# Altium PCB project_vodorezov_switch.PcbDoc (part 1 of 2)
Units mm, origin at the board's own origin, x right, y up, seen from the top; angles counter-clockwise.
Board outline 100 x 50 mm, 6 copper layers (Top Layer, Signal Layer 1, Signal Layer 2, Signal Layer 3, Signal Layer 4, Bottom Layer), stack 1.503 mm thick; 130 components, 96 nets, 660 pads, 0 vias.
Unrouted connection lines stored in the file: 415.
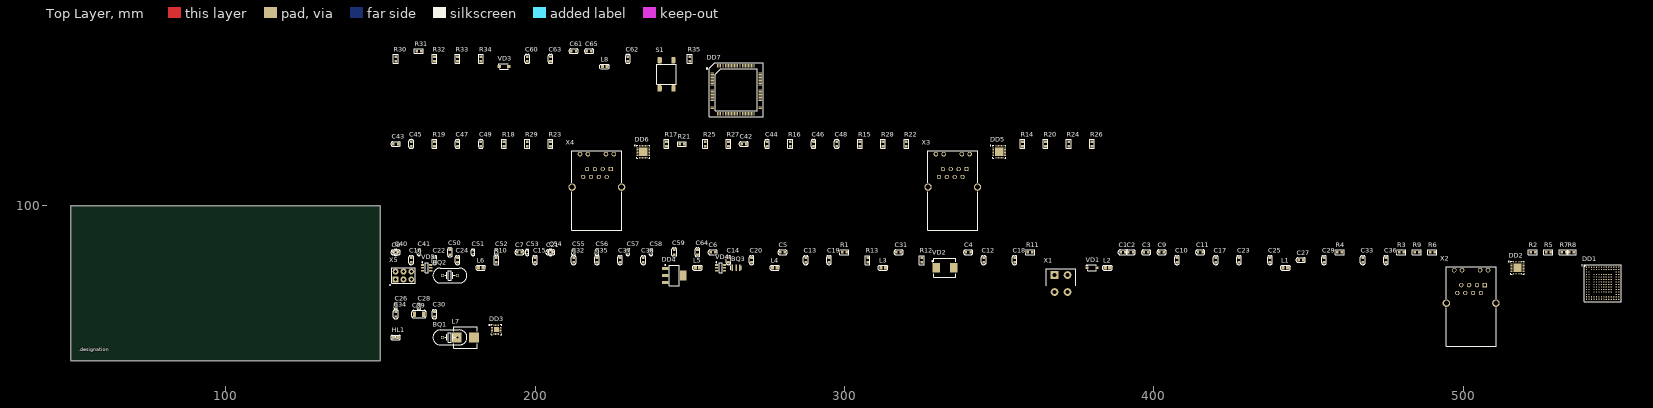
[diagram p0: Top Layer view]
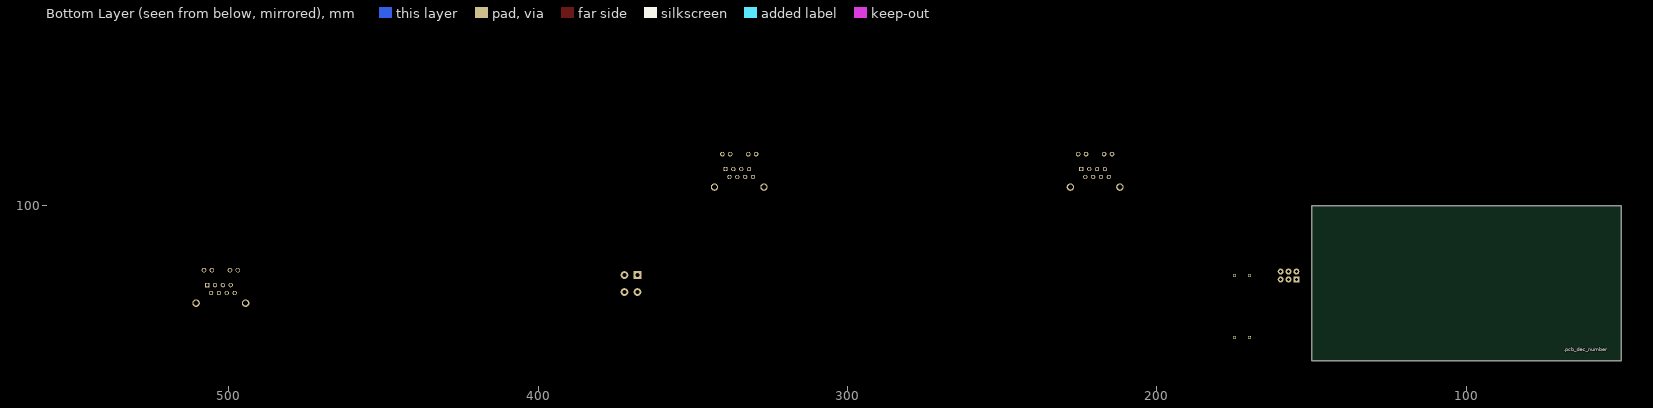
[diagram p1: Bottom Layer view, seen from below]

## Layer stack, top to bottom
Top Solder: solder mask 0.0102, Solder Resist, Dk 3.5
Top Layer: signal copper 0.018
Prepreg 1: prepreg 0.125, FR4 HiTg170, Dk 5.07
Signal Layer 1: signal copper 0.018
Core 1: core 0.51, FR4, Dk 4.6
Signal Layer 2: signal copper 0.018
Prepreg 2: prepreg 0.125, FR4 HiTg170, Dk 5.07
Signal Layer 3: signal copper 0.018
Core 2: core 0.51, FR4, Dk 4.6
Signal Layer 4: signal copper 0.018
Prepreg 3: prepreg 0.125, FR4 HiTg170, Dk 5.07
Bottom Layer: signal copper 0.018
Bottom Solder: solder mask 0.0102, Solder Resist, Dk 3.5

## Board outline
50,50 150,50 150,100 50,100

## Design rules (kind name [scope] priority, off if disabled: settings)
AcuteAngle min_acute_angle [OnCopper] p1: minimum=3.50000000000000E+0001 checktracksonly=FALSE // Минимальный угол между примитивами топологии
BoardOutlineClearance board_outline_clearance_std [NOT (OnLayer('Bottom Overlay') OR OnLayer('Top Overlay'))] p1: gap=0.25 ignorepadtopadclearanceinfootprint=FALSE except(0: Arc-SplitContinuation Track-SplitContinuation SMDPad-SplitContinuation THPad-SplitContinuation Via-SplitContinuation Fill-SplitContinuation Poly-SplitContinuation Region-SplitContinuation Text-SplitContinuation) // Отступ элементов топологии от края фрезеруемой печатной платы
Clearance clearance_outer_18um_std [OnTopLayer OR OnBottomLayer] p1: gap=0.125 ignorepadtopadclearanceinfootprint=TRUE except(0.2: Arc-Fill Arc-Poly Track-Fill Track-Poly SMDPad-SMDPad SMDPad-Fill SMDPad-Poly THPad-Fill THPad-Poly Via-Fill Via-Poly Fill-Fill Fill-Poly Poly-Poly Poly-Region Poly-Text; 0.25: Arc-Hole Track-Hole SMDPad-Hole THPad-Hole Via-Hole Fill-Hole Poly-Hole Region-Hole Text-Hole) // Зазоры на внешних слоях
Clearance clearance_inner_18um_std [NOT (OnTopLayer Or OnBottomLayer)] p2: gap=0.125 ignorepadtopadclearanceinfootprint=FALSE except(0.2: Arc-Fill Arc-Poly Track-Fill Track-Poly SMDPad-SMDPad SMDPad-Fill SMDPad-Poly THPad-Fill THPad-Poly Via-Fill Via-Poly Fill-Fill Fill-Poly Poly-Poly Poly-Region Poly-Text; 0.25: Arc-Hole Track-Hole SMDPad-Hole THPad-Hole Via-Hole Fill-Hole Poly-Hole Region-Hole Text-Hole) // Зазоры на внутренних слоях
ComponentClearance [All] p1: gap=0 collisioncheckmode=3 verticalgap=0 showdistances=FALSE
DiffPairsRouting diff_pairs_routing [All] p1: maxlimit=0.254 minlimit=0.127 mostfreqgap=0.254 toplayer_maxgap=0.127 toplayer_prefgap=0.127 toplayer_minwidth=0.143 toplayer_maxwidth=0.143 toplayer_prefwidth=0.143 midlayer1_minwidth=0.381 midlayer1_maxwidth=0.381 midlayer1_prefwidth=0.381 midlayer2_minwidth=0.381 midlayer2_maxwidth=0.381 midlayer2_prefwidth=0.381 midlayer3_minwidth=0.381 midlayer3_maxwidth=0.381 midlayer3_prefwidth=0.381 midlayer4_minwidth=0.381 midlayer4_maxwidth=0.381 midlayer4_prefwidth=0.381 bottomlayer_maxgap=0.127 bottomlayer_prefgap=0.127 bottomlayer_minwidth=0.143 bottomlayer_maxwidth=0.143 bottomlayer_prefwidth=0.143 impedanceprofiledriven=TRUE impedanceprofileid={FD46899E-B5A2-4EF5-A302-5D2DB6A51F35} maxuncoupledlength=12.7 // Правила трассировки дифференциальных пар
HoleSize min_hole_size_std [IsPad] p1: absolutevalues=TRUE maxlimit=5.9 minlimit=0.6 maxpercent=80.000 minpercent=20.000 // Диаметр межслойного переходного отверстия
HoleSize min_hole_size_via_std [IsVia] p2: absolutevalues=TRUE maxlimit=5.9 minlimit=0.3 maxpercent=80.000 minpercent=20.000 // Минимальный диаметр монтажного отверстия
HoleToHoleClearance hole_to_hole_clearance_std [All] p1: gap=0.2 allowstackedmicrovias=FALSE // Минимальное расстояние между краями двух отверстий
MinimumAnnularRing min_via_ar_std [All] p1: minimumring=0.15 // Поясок площадки переходного отверстия (Annular ring VIA)
MinimumAnnularRing min_pad_ar_std [All] p2: minimumring=0.2 // Поясок монтажной контактной площадки (Annular ring PAD)
MinimumSolderMaskSliver min_solder_mask_bridge_std [All] p1: minsoldermaskwidth=0.15 // Мнимальная ширина масочного мостика
PlaneClearance plane_clearance_18um_std [All] p1: clearance=0.2 // Отступ полигона (для слоя plane) от элементов топологии
PlaneConnect [All] p1: planeconnectstyle=Relief reliefexpansion=0.5 reliefentries=4 reliefconductorwidth=0.2 reliefairgap=0.2
PolygonConnect poly_connect_to_pad<=0.3 [(AsMM(PadXSize_AllLayers)<=0.301) or (AsMM(PadYSize_AllLayers)<=0.301)] p1: thpad.connectstyle=Relief thpad.reliefconductorwidth=0.2 thpad.reliefentries=4 thpad.polygonreliefangle="90 Angle" thpad.airgapwidth=0.2 smdpad.connectstyle=Relief smdpad.reliefconductorwidth=0.2 smdpad.reliefentries=4 smdpad.polygonreliefangle="90 Angle" smdpad.airgapwidth=0.2 via.connectstyle=Direct via.reliefconductorwidth=0.254 via.reliefentries=4 via.polygonreliefangle="90 Angle" via.airgapwidth=0.254 // Правила подключения полигонов для падов от 0,3мм и меньше
PolygonConnect poly_connect_to_pad<=0.4 [(AsMM(PadXSize_AllLayers)<=0.401) or (AsMM(PadYSize_AllLayers)<=0.401)] p2: thpad.connectstyle=Relief thpad.reliefconductorwidth=0.26 thpad.reliefentries=4 thpad.polygonreliefangle="90 Angle" thpad.airgapwidth=0.2 smdpad.connectstyle=Relief smdpad.reliefconductorwidth=0.26 smdpad.reliefentries=4 smdpad.polygonreliefangle="90 Angle" smdpad.airgapwidth=0.2 via.connectstyle=Direct via.reliefconductorwidth=0.254 via.reliefentries=4 via.polygonreliefangle="90 Angle" via.airgapwidth=0.254 // Правила подключения полигонов для падов от 0,4 и меньше
PolygonConnect poly_connect_to_pad<=0.6 [(AsMM(PadXSize_AllLayers)<=0.601) or (AsMM(PadYSize_AllLayers)<=0.601)] p3: thpad.connectstyle=Relief thpad.reliefconductorwidth=0.33 thpad.reliefentries=4 thpad.polygonreliefangle="90 Angle" thpad.airgapwidth=0.2 smdpad.connectstyle=Relief smdpad.reliefconductorwidth=0.33 smdpad.reliefentries=4 smdpad.polygonreliefangle="90 Angle" smdpad.airgapwidth=0.2 via.connectstyle=Direct via.reliefconductorwidth=0.254 via.reliefentries=4 via.polygonreliefangle="90 Angle" via.airgapwidth=0.254 // Правила подключения полигонов для падов от 0,6мм и меньше
PolygonConnect poly_connect_to_pad<=0.7 [(AsMM(PadXSize_AllLayers)<=0.701) or (AsMM(PadYSize_AllLayers)<=0.701)] p4: thpad.connectstyle=Relief thpad.reliefconductorwidth=0.46 thpad.reliefentries=4 thpad.polygonreliefangle="90 Angle" thpad.airgapwidth=0.2 smdpad.connectstyle=Relief smdpad.reliefconductorwidth=0.46 smdpad.reliefentries=4 smdpad.polygonreliefangle="90 Angle" smdpad.airgapwidth=0.2 via.connectstyle=Direct via.reliefconductorwidth=0.254 via.reliefentries=4 via.polygonreliefangle="90 Angle" via.airgapwidth=0.254 // Правила подключения полигонов для падов от 0,7мм и меньше
PolygonConnect poly_connect_to_pad<=0.8 [(AsMM(PadXSize_AllLayers)<=0.8)or(AsMM(PadYSize_AllLayers)<=0.8)] p5: thpad.connectstyle=Relief thpad.reliefconductorwidth=0.53 thpad.reliefentries=4 thpad.polygonreliefangle="90 Angle" thpad.airgapwidth=0.3 smdpad.connectstyle=Relief smdpad.reliefconductorwidth=0.53 smdpad.reliefentries=4 smdpad.polygonreliefangle="90 Angle" smdpad.airgapwidth=0.2 via.connectstyle=Direct via.reliefconductorwidth=0.254 via.reliefentries=4 via.polygonreliefangle="90 Angle" via.airgapwidth=0.254 // Правила подключения полигонов для падов от 0,8мм и меньше
PolygonConnect poly_connect_to_pad<=1 [(AsMM(PadXSize_AllLayers)<=1.01)or(AsMM(PadYSize_AllLayers)<=1.01)] p6: thpad.connectstyle=Relief thpad.reliefconductorwidth=0.6 thpad.reliefentries=4 thpad.polygonreliefangle="90 Angle" thpad.airgapwidth=0.3 smdpad.connectstyle=Relief smdpad.reliefconductorwidth=0.6 smdpad.reliefentries=4 smdpad.polygonreliefangle="90 Angle" smdpad.airgapwidth=0.2 via.connectstyle=Direct via.reliefconductorwidth=0.254 via.reliefentries=4 via.polygonreliefangle="90 Angle" via.airgapwidth=0.254 // Правила подключения полигонов для падов от 1мм и меньше
PolygonConnect poly_connect_to_pad<=1.3 [(AsMM(PadXSize_AllLayers)<=1.31)or(AsMM(PadYSize_AllLayers)<=1.31)] p7: thpad.connectstyle=Relief thpad.reliefconductorwidth=0.66 thpad.reliefentries=4 thpad.polygonreliefangle="90 Angle" thpad.airgapwidth=0.3 smdpad.connectstyle=Relief smdpad.reliefconductorwidth=0.86 smdpad.reliefentries=4 smdpad.polygonreliefangle="90 Angle" smdpad.airgapwidth=0.2 via.connectstyle=Direct via.reliefconductorwidth=0.254 via.reliefentries=4 via.polygonreliefangle="90 Angle" via.airgapwidth=0.254 // Правила подключения полигонов для падов от 1,3мм и меньше
PolygonConnect poly_connect_to_pad<=1.6 [(AsMM(PadXSize_AllLayers)<=1.61)or(AsMM(PadYSize_AllLayers)<=1.61)] p8: thpad.connectstyle=Relief thpad.reliefconductorwidth=0.8 thpad.reliefentries=4 thpad.polygonreliefangle="90 Angle" thpad.airgapwidth=0.3 smdpad.connectstyle=Relief smdpad.reliefconductorwidth=1 smdpad.reliefentries=4 smdpad.polygonreliefangle="90 Angle" smdpad.airgapwidth=0.2 via.connectstyle=Direct via.reliefconductorwidth=0.254 via.reliefentries=4 via.polygonreliefangle="90 Angle" via.airgapwidth=0.254 // Правила подключения полигонов для падов от 1,6мм и меньше
PolygonConnect poly_connect_to_pad<=1.8 [(AsMM(PadXSize_AllLayers)<=1.8)or(AsMM(PadYSize_AllLayers)<=1.8)] p9: thpad.connectstyle=Relief thpad.reliefconductorwidth=1 thpad.reliefentries=4 thpad.polygonreliefangle="90 Angle" thpad.airgapwidth=0.3 smdpad.connectstyle=Relief smdpad.reliefconductorwidth=1.2 smdpad.reliefentries=4 smdpad.polygonreliefangle="90 Angle" smdpad.airgapwidth=0.2 via.connectstyle=Direct via.reliefconductorwidth=0.254 via.reliefentries=4 via.polygonreliefangle="90 Angle" via.airgapwidth=0.254 // Правила подключения полигонов для падов от 1,8мм и меньше
PolygonConnect poly_connect_to_pad<=2 [(AsMM(PadXSize_AllLayers)<=2.01)or(AsMM(PadYSize_AllLayers)<=2.01)] p10: thpad.connectstyle=Relief thpad.reliefconductorwidth=1.1 thpad.reliefentries=4 thpad.polygonreliefangle="90 Angle" thpad.airgapwidth=0.3 smdpad.connectstyle=Relief smdpad.reliefconductorwidth=1.4 smdpad.reliefentries=4 smdpad.polygonreliefangle="90 Angle" smdpad.airgapwidth=0.2 via.connectstyle=Direct via.reliefconductorwidth=0.254 via.reliefentries=4 via.polygonreliefangle="90 Angle" via.airgapwidth=0.254 // Правила подключения полигонов для падов от 2мм и меньше
PolygonConnect poly_connect_to_pad<=2.3 [(AsMM(PadXSize_AllLayers)<=2.31)or(AsMM(PadYSize_AllLayers)<=2.31)] p11: thpad.connectstyle=Relief thpad.reliefconductorwidth=1.2 thpad.reliefentries=4 thpad.polygonreliefangle="90 Angle" thpad.airgapwidth=0.3 smdpad.connectstyle=Relief smdpad.reliefconductorwidth=1.4 smdpad.reliefentries=4 smdpad.polygonreliefangle="90 Angle" smdpad.airgapwidth=0.2 via.connectstyle=Direct via.reliefconductorwidth=0.254 via.reliefentries=4 via.polygonreliefangle="90 Angle" via.airgapwidth=0.254 // Правила подключения полигонов для падов от 2,3мм и меньше
PolygonConnect poly_connect_to_pad<=2.5 [(AsMM(PadXSize_AllLayers)<=2.51)or(AsMM(PadYSize_AllLayers)<=2.51)] p12: thpad.connectstyle=Relief thpad.reliefconductorwidth=1.2 thpad.reliefentries=4 thpad.polygonreliefangle="90 Angle" thpad.airgapwidth=0.3 smdpad.connectstyle=Relief smdpad.reliefconductorwidth=1.4 smdpad.reliefentries=4 smdpad.polygonreliefangle="90 Angle" smdpad.airgapwidth=0.2 via.connectstyle=Direct via.reliefconductorwidth=0.254 via.reliefentries=4 via.polygonreliefangle="90 Angle" via.airgapwidth=0.254 // Правила подключения полигонов для падов от 2,5мм и меньше
PolygonConnect poly_connect_to_pad<=2.7 [(AsMM(PadXSize_AllLayers)<=2.71)or(AsMM(PadYSize_AllLayers)<=2.71)] p13: thpad.connectstyle=Relief thpad.reliefconductorwidth=1.4 thpad.reliefentries=4 thpad.polygonreliefangle="90 Angle" thpad.airgapwidth=0.3 smdpad.connectstyle=Relief smdpad.reliefconductorwidth=1.6 smdpad.reliefentries=4 smdpad.polygonreliefangle="90 Angle" smdpad.airgapwidth=0.2 via.connectstyle=Direct via.reliefconductorwidth=0.254 via.reliefentries=4 via.polygonreliefangle="90 Angle" via.airgapwidth=0.254 // Правила подключения полигонов для падов от 2,7мм и меньше
PolygonConnect poly_connect_to_pad<=3 [(AsMM(PadXSize_AllLayers)<=3.01)or(AsMM(PadYSize_AllLayers)<=3.01)] p14: thpad.connectstyle=Relief thpad.reliefconductorwidth=1.6 thpad.reliefentries=4 thpad.polygonreliefangle="90 Angle" thpad.airgapwidth=0.3 smdpad.connectstyle=Relief smdpad.reliefconductorwidth=1.8 smdpad.reliefentries=4 smdpad.polygonreliefangle="90 Angle" smdpad.airgapwidth=0.2 via.connectstyle=Direct via.reliefconductorwidth=0.254 via.reliefentries=4 via.polygonreliefangle="90 Angle" via.airgapwidth=0.254 // Правила подключения полигонов для падов от 3мм и меньше
PolygonConnect poly_connect_to_pad<=7 [(AsMM(PadXSize_AllLayers)<7.01)or(AsMM(PadYSize_AllLayers)<=7.01)] p15: thpad.connectstyle=Relief thpad.reliefconductorwidth=2 thpad.reliefentries=4 thpad.polygonreliefangle="90 Angle" thpad.airgapwidth=0.4 smdpad.connectstyle=Relief smdpad.reliefconductorwidth=2 smdpad.reliefentries=4 smdpad.polygonreliefangle="90 Angle" smdpad.airgapwidth=0.3 via.connectstyle=Direct via.reliefconductorwidth=0.254 via.reliefentries=4 via.polygonreliefangle="90 Angle" via.airgapwidth=0.254 // Правила подключения полигонов для падов от 7мм и меньше
PolygonConnect poly_connect_to_pad [All] p16: thpad.connectstyle=Relief thpad.reliefconductorwidth=0.25 thpad.reliefentries=4 thpad.polygonreliefangle="90 Angle" thpad.airgapwidth=0.2 smdpad.connectstyle=Relief smdpad.reliefconductorwidth=0.25 smdpad.reliefentries=4 smdpad.polygonreliefangle="90 Angle" smdpad.airgapwidth=0.2 via.connectstyle=Direct via.reliefconductorwidth=0.25 via.reliefentries=4 via.polygonreliefangle="90 Angle" via.airgapwidth=0.2 // Правила подключения полигонов общие
RoomDefinition project_vodorezov_switch3 [InComponentClass('project_vodorezov_switch3')] p1: confinementstyle=ConfineIn formatcopy=TRUE lockcomponents=FALSE outline 0,0 50.8,0 50.8,25.4 0,25.4
RoomDefinition project_vodorezov_switch2 [InComponentClass('project_vodorezov_switch2')] p2: confinementstyle=ConfineIn formatcopy=TRUE lockcomponents=FALSE outline 0,0 50.8,0 50.8,25.4 0,25.4
RoomDefinition project_vodorezov_switch1 [InComponentClass('project_vodorezov_switch1')] p3: confinementstyle=ConfineIn formatcopy=TRUE lockcomponents=FALSE outline 0,0 50.8,0 50.8,25.4 0,25.4
RoutingCorners [All] p1 off: cornerstyle=45-Degree minsetback=2.5 maxsetback=2.5
RoutingVias [All] p1: holewidth=0.3 width=0.6 viastyle="Through Hole" minholewidth=0.3 minwidth=0.6 maxholewidth=5.9 maxwidth=6.4
SilkToSilkClearance silk_to_silk_clearance_std [All] p1 off: silktosilkclearance=0.15 // Отступ текста шелкографии от других примитивов шелкографии
SilkToSolderMaskClearance silk_to_solder_mask_clearance_std [IsPad] p1 off: minsilkscreentomaskgap=0.15 clearancetoexposedcopper=FALSE // Минимальное расстояние между элементами шелкографии и вскрытой медью
SolderMaskExpansion solder_mask_expansion_std [All] p1: expansion=0.05 // Припуск паяльной масски
UnRoutedNet [All] p1: checkbadconnections=TRUE
Width width_18um_std [All] p1: maxlimit=10 minlimit=0.125 preferedwidth=0.15 checkconnectedcopper=TRUE // Ширина проводников (общая)
19 further rules are at their usual default settings.

## Classes and differential pairs
component class project_vodorezov_switch3: BQ3 C50 C51 C52 C53 C54 C55 C56 C57 C58 C59 C60 C61 C62 C63 C64 C65 DD7 L8 R30 R31 R32 R33 R34 R35 S1 VD3 VD4 VD5 X5
component class project_vodorezov_switch2: BQ2 C40 C41 C42 C43 C44 C45 C46 C47 C48 C49 DD5 DD6 R14 R15 R16 R17 R18 R19 R20 R21 R22 R23 R24 R25 R26 R27 R28 R29 X3 X4
component class project_vodorezov_switch1: BQ1 C1 C2 C3 C4 C5 C6 C7 C8 C9 C10 C11 C12 C13 C14 C15 C16 C17 C18 C19 C20 C21 C22 C23 C24 C25 C26 C27 C28 C29 C30 C31 C32 C33 C34 C35 C36 C37 C38 C39 DD1 DD2 DD3 DD4 HL1 L1 L2 L3 L4 L5 L6 L7 R1 R2 R3 R4 R5 R6 R7 R8 R9 R10 R11 R12 R13 VD1 VD2 X1 X2

## Components (designator, comment, footprint, x,y, rotation, side; value= is the part's Value field where it differs from the comment)
BQ1 "ECS-250-18-4X-СKM" HC-49/US 172.5,57.5 r0 top
BQ2 "ECS-500-20-4X-DU" HC-49/US 172.5,77.5 r0 top
BQ3 "CSTCE12M0G52A-R0" CSTCE-3-P120-320X130X70 265,80 r0 top
C1 "0,1 мк" C0603 390,85 r0 top
C2 "1 мк" C0603 392.5,85 r0 top
C3 "0,1 мк" C0603 397.5,85 r0 top
C4 "0,1 мк" C0603 340,85 r0 top
C5 "0,1 мк" C0603 280,85 r0 top
C6 "0,1 мк" C0603 257.5,85 r0 top
C7 "0,1 мк" C0603 195,85 r0 top
C8 "0,1 мк" C0603 155,85 r0 top
C9 "1 мк" C0603 402.5,85 r0 top
C10 "0,1 мк" C0603 407.5,82.5 r90 top
C11 "1 мк" C0603 415,85 r0 top
C12 "1 мк" C0603 345,82.5 r90 top
C13 "1 мк" C0603 287.5,82.5 r90 top
C14 "1 мк" C0603 262.5,82.5 r90 top
C15 "1 мк" C0603 200,82.5 r90 top
C16 "1 мк" C0603 160,82.5 r90 top
C17 "0,1 мк" C0603 420,82.5 r90 top
C18 "0,1 мк" C0603 355,82.5 r90 top
C19 "0,1 мк" C0603 295,82.5 r90 top
C20 "0,1 мк" C0603 270,82.5 r90 top
C21 "0,1 мк" C0603 205,85 r0 top
C22 "0,1 мк" C0603 167.5,82.5 r90 top
C23 "1 мк" C0603 427.5,82.5 r90 top
C24 "0,1 мк" C0603 175,82.5 r90 top
C25 "0,1 мк" C0603 437.5,82.5 r90 top
C26 "20" C0402 155,67.5 r90 top
C27 "0,47 мк" C0603 447.5,82.5 r0 top
C28 "20" C0402 162.5,67.5 r90 top
C29 "1 мк" C0603 455,82.5 r90 top
C30 "1 мк" C0603 167.5,65 r90 top
C31 "0,1 мк" C0603 317.5,85 r0 top
C32 "1 мк" C0603 212.5,82.5 r90 top
C33 "1 мк" C0603 467.5,82.5 r90 top
C34 "20" C0603 155,65 r90 top
C35 "0,1 мк" C0603 220,82.5 r90 top
C36 "1 мк" C0603 475,82.5 r90 top
C37 "1 мк" C0603 227.5,82.5 r90 top
C38 "10 мк" C0603 235,82.5 r90 top
C39 "22 мк" C1206 162.5,65 r0 top
C40 "20" C0402 155,85 r90 top
C41 "20" C0402 162.5,85 r90 top
C42 "0,47 мк" C0603 267.5,120 r0 top
C43 "0,47 мк" C0603 155,120 r0 top
C44 "1 мк" C0603 275,120 r90 top
C45 "1 мк" C0603 160,120 r90 top
C46 "1 мк" C0603 290,120 r90 top
C47 "1 мк" C0603 175,120 r90 top
C48 "1 мк" C0603 297.5,120 r90 top
C49 "1 мк" C0603 182.5,120 r90 top
C50 "4,7 мк" C0603 172.5,85 r90 top
C51 "0,1 мк" C0402 180,85 r90 top
C52 "0,1 мк" C0402 187.5,85 r90 top
C53 "0,1 мк" C0402 197.5,85 r90 top
C54 "0,1 мк" C0402 205,85 r90 top
C55 "0,1 мк" C0402 212.5,85 r90 top
C56 "0,1 мк" C0402 220,85 r90 top
C57 "0,1 мк" C0402 230,85 r90 top
C58 "0,1 мк" C0402 237.5,85 r90 top
C59 "1 мк" C0603 245,85 r90 top
C60 "2,2 мк" C0603 197.5,147.5 r90 top
C61 "0,01 мк" C0603 212.5,150 r0 top
C62 "0,1 мк" C0603 230,147.5 r90 top
C63 "2,2 мк" C0603 205,147.5 r90 top
C64 "1 мк" C0603 252.5,85 r90 top
C65 "0,01 мк" C0603 217.5,150 r0 top
DD1 "SJA1105TELY" BGA159 545,75 r0 top
DD2 "LAN8742A" QFN-24-P50-400X400X80-L40X25-T270X270 517.5,80 r0 top
DD3 "TLV62130ARGTT" WQFN-16-P50-300X300X100-L40X24-T168X168 187.5,60 r0 top
DD4 "LD1117S12TR" SOT230P700X180-4N 245,77.5 r0 top
DD5 "LAN8742A" QFN-24-P50-400X400X80-L40X25-T270X270 350,117.5 r0 top
DD6 "LAN8742A" QFN-24-P50-400X400X80-L40X25-T270X270 235,117.5 r0 top
DD7 "STM32F407VGT6" LQFP-100-P50-1400X1400X160-L60X22 265,137.5 r0 top
HL1 "TLMS1000-GS08" HL0603 155,57.5 r0 top
L1 "FCM1608KF-331T03" FCM-2-0603 442.5,80 r0 top
L2 "FCM1608KF-331T03" FCM-2-0603 385,80 r0 top
L3 "FCM1608KF-331T03" FCM-2-0603 312.5,80 r0 top
L4 "FCM1608KF-331T03" FCM-2-0603 277.5,80 r0 top
L5 "FCM1608KF-331T03" FCM-2-0603 252.5,80 r0 top
L6 "FCM1608KF-331T03" FCM-2-0603 182.5,80 r0 top
L7 "SRP7028A-220M" SRP-2-730X660X280 177.5,57.5 r0 top
L8 "BLM18KG221SH1D" BLM-2-0603 222.5,145 r0 top
R1 "750" R0603 300,85 r0 top
R2 "49.9" R0603 522.5,85 r0 top
R3 "12 к" R0603 480,85 r0 top
R4 "100" R0603 460,85 r0 top
R5 "49.9" R0603 527.5,85 r0 top
R6 "220" R0603 490,85 r0 top
R7 "49.9" R0603 532.5,85 r0 top
R8 "49.9" R0603 535,85 r0 top
R9 "220" R0603 485,85 r0 top
R10 "120" R0603 187.5,82.5 r90 top
R11 "100 к" R0603 360,85 r0 top
R12 "910 к" R0603 325,82.5 r90 top
R13 "180 к" R0603 307.5,82.5 r90 top
R14 "49.9" R0603 357.5,120 r90 top
R15 "12 к" R0603 305,120 r90 top
R16 "100" R0603 282.5,120 r90 top
R17 "49.9" R0603 242.5,120 r90 top
R18 "12 к" R0603 190,120 r90 top
R19 "100" R0603 167.5,120 r90 top
R20 "49.9" R0603 365,120 r90 top
R21 "49.9" R0603 247.5,120 r0 top
R22 "220" R0603 320,120 r90 top
R23 "220" R0603 205,120 r90 top
R24 "49.9" R0603 372.5,120 r90 top
R25 "49.9" R0603 255,120 r90 top
R26 "49.9" R0603 380,120 r90 top
R27 "49.9" R0603 262.5,120 r90 top
R28 "220" R0603 312.5,120 r90 top
R29 "220" R0603 197.5,120 r90 top
R30 "10 к" R0603 155,147.5 r90 top
R31 "22" R0603 162.5,150 r0 top
R32 "22" R0603 167.5,147.5 r90 top
R33 "22" R0603 175,147.5 r90 top
R34 "22" R0603 182.5,147.5 r90 top
R35 "10 к" R0603 250,147.5 r90 top
S1 "FSM4JSMA" FSM4JSMA 242.5,142.5 r90 top
VD1 "MBR0530T1G" SOD-123-368X160X135 380,80 r0 top
VD2 "1.5SMC62CA" DO-214AB-790X590X262 332.5,80 r0 top
VD3 "MBR140SFT1G" SOD-123FL-370X165X98 190,145 r0 top
VD4 "TPD2S017DBVR" SOT-23-6-P95-290X280X145 260,80 r0 top
VD5 "TPD2S017DBVR" SOT-23-6-P95-290X280X145 165,80 r0 top
X1 "4-1775099-0" 4-1775099-0 370,75 r0 top
X2 "5-2301994-8" 5-2301994-8 502.5,67.5 r0 top
X3 "5-2301994-8" 5-2301994-8 335,105 r0 top
X4 "5-2301994-8" 5-2301994-8 220,105 r0 top
X5 "DS1021-2x3SF11-B" DS1021-2X3SF11-B 157.5,77.5 r0 top

## Footprints (in the part's own frame and the unit in brackets; to place one, negate y for a bottom-side part, rotate by r counter-clockwise, add the part's x,y. Pads: shape width x height; smd on the part's side, far side on the other; paste and mask are expansions set on the pad)
4-1775099-0 [mm] "ATX Power 4 Pins Mount Header, V/A Type"
  rect 2.5x2.5 hole 1.4: 1(-2.1,2.65)
  round 2.5 hole 1.4: 2(2.1,2.65) 3(-2.1,-2.85) 4(2.1,-2.85)
  silkscreen extent -4.75,-0.75 4.75,4.75, body extent -5.1,-6.1 4.75,4.8, height 12.8
5-2301994-8 [mm] "RJ45 with Integrated Magnetics, 10/100 Mbps, LED, R/A Type"
  rect 1.4x1.4 hole 0.9: 1(4.445,6.89)
  round 1.4 hole 0.9: 2(3.175,4.35) 3(1.905,6.89) 4(0.635,4.35) 5(-0.635,6.89) 6(-1.905,4.35) 7(-3.175,6.89) 8(-4.445,4.35)
  round 1.5 hole 1.02: 9(5.465,11.72) 10(2.925,11.72) 11(-2.925,11.72) 12(-5.465,11.72)
  round 2.4 hole 1.6: TP1(-8,1.05) TP1(8,1.05)
  round 0 hole 3.35: ""(-5.715,-2) ""(5.715,-2)
  silkscreen extent -8.1,-12.9 8.1,12.8, body extent -9.37,-12.94 9.37,12.5, height 15.15
BGA159 [mm] "BGA, 159-Leads, Body 12,00x12,00mmx1,50mm, Pitch 0,80mm"
  round 0.4 smd: A1(-5.2,5.2) A2(-4.4,5.2) A3(-3.6,5.2) A4(-2.8,5.2) A5(-2,5.2) A6(-1.2,5.2) A7(-0.4,5.2) A8(0.4,5.2) A9(1.2,5.2) A10(2,5.2) A11(2.8,5.2) A12(3.6,5.2) A13(4.4,5.2) A14(5.2,5.2) B1(-5.2,4.4) B3(-3.6,4.4) B4(-2.8,4.4) B5(-2,4.4) B6(-1.2,4.4) B7(-0.4,4.4) B8(0.4,4.4) B9(1.2,4.4) B10(2,4.4) B11(2.8,4.4) B12(3.6,4.4) B13(4.4,4.4) B14(5.2,4.4) C1(-5.2,3.6) C2(-4.4,3.6) C13(4.4,3.6) C14(5.2,3.6) D1(-5.2,2.8) D2(-4.4,2.8) D4(-2.8,2.8) D5(-2,2.8) D6(-1.2,2.8) D7(-0.4,2.8) D8(0.4,2.8) D9(1.2,2.8) D10(2,2.8) D11(2.8,2.8) D13(4.4,2.8) D14(5.2,2.8) E1(-5.2,2) E2(-4.4,2) E4(-2.8,2) E5(-2,2) E6(-1.2,2) E7(-0.4,2) E8(0.4,2) E9(1.2,2) E10(2,2) E11(2.8,2) E13(4.4,2) E14(5.2,2) F1(-5.2,1.2) F2(-4.4,1.2) F4(-2.8,1.2) F5(-2,1.2) F6(-1.2,1.2) F7(-0.4,1.2) F8(0.4,1.2) F9(1.2,1.2) F10(2,1.2) F11(2.8,1.2) F13(4.4,1.2) F14(5.2,1.2) G1(-5.2,0.4) G2(-4.4,0.4) G4(-2.8,0.4) G5(-2,0.4) G6(-1.2,0.4) G7(-0.4,0.4) G8(0.4,0.4) G9(1.2,0.4) G10(2,0.4) G11(2.8,0.4) G13(4.4,0.4) G14(5.2,0.4) H1(-5.2,-0.4) H2(-4.4,-0.4) H4(-2.8,-0.4) H5(-2,-0.4) H6(-1.2,-0.4) H7(-0.4,-0.4) H8(0.4,-0.4) H9(1.2,-0.4) H10(2,-0.4) H11(2.8,-0.4) H13(4.4,-0.4) H14(5.2,-0.4) J1(-5.2,-1.2) J2(-4.4,-1.2) J4(-2.8,-1.2) J5(-2,-1.2) J6(-1.2,-1.2) J7(-0.4,-1.2) J8(0.4,-1.2) J9(1.2,-1.2) J10(2,-1.2) J11(2.8,-1.2) J13(4.4,-1.2) J14(5.2,-1.2) K1(-5.2,-2) K2(-4.4,-2) K4(-2.8,-2) K5(-2,-2) K6(-1.2,-2) K7(-0.4,-2) K8(0.4,-2) K9(1.2,-2) K10(2,-2) K11(2.8,-2) K13(4.4,-2) K14(5.2,-2) L1(-5.2,-2.8) L2(-4.4,-2.8) L4(-2.8,-2.8) L5(-2,-2.8) L6(-1.2,-2.8) L7(-0.4,-2.8) L8(0.4,-2.8) L9(1.2,-2.8) L10(2,-2.8) L11(2.8,-2.8) L13(4.4,-2.8) L14(5.2,-2.8) M1(-5.2,-3.6) M2(-4.4,-3.6) M13(4.4,-3.6) M14(5.2,-3.6) N1(-5.2,-4.4) N2(-4.4,-4.4) N3(-3.6,-4.4) N4(-2.8,-4.4) N5(-2,-4.4) N6(-1.2,-4.4) N7(-0.4,-4.4) N8(0.4,-4.4) N9(1.2,-4.4) N10(2,-4.4) N11(2.8,-4.4) N12(3.6,-4.4) N13(4.4,-4.4) N14(5.2,-4.4) P1(-5.2,-5.2) P2(-4.4,-5.2) P3(-3.6,-5.2) P4(-2.8,-5.2) P5(-2,-5.2) P6(-1.2,-5.2) P7(-0.4,-5.2) P8(0.4,-5.2) P9(1.2,-5.2) P10(2,-5.2) P11(2.8,-5.2) P12(3.6,-5.2) P13(4.4,-5.2) P14(5.2,-5.2)
  silkscreen extent -6.77,-6 6,6, body extent -6,-6 6,6, height 1.5
BLM-2-0603 [mm] "Chip Inductor, 2-Leads, Body 1,60x0,80mm, IPC Medium Density"
  rect 1.02x0.98 smd: 1(-0.74,0) 2(0.74,0)
  silkscreen extent -1.5,-0.75 1.5,0.75, body extent -0.8,-0.37 0.8,0.38, height 0.8
C0402 [mm] "Chip Capacitor, 2-Leads, Body 1,00x0,50mm, IPC Medium Density"
  rrect50% 0.5x0.5 smd: 1(-0.5,0) 2(0.5,0)
  silkscreen extent -1.05,-0.55 1.05,0.55, body extent -0.5,-0.25 0.5,0.25, height 0.5
C0603 [mm] "Chip Capacitor, 2-Leads, Body 1,60x0,80mm, IPC Medium Density"
  rrect50% 0.8x0.9 smd: 1(-0.75,0) 2(0.75,0)
  silkscreen extent -1.45,-0.75 1.45,0.75, body extent -0.8,-0.4 0.8,0.4, height 0.8
C1206 [mm] "Chip Capacitor, 2-Leads, Body 3,20x1,60mm, IPC Medium Density"
  rrect50% 1x1.8 smd: 1(-1.5,0) 2(1.5,0)
  silkscreen extent -2.3,-1.2 2.3,1.2, body extent -1.6,-0.8 1.6,0.8, height 0.78
CSTCE-3-P120-320X130X70 [mm] "Ceramic Chip Oscillator, Body 3,20x1,30mm, 3-Leads, Pitch 1,20mm"
  rrect25% 0.5x2 smd paste-0.025 mask+0.1: 1(-1.2,0) 2(0,0) 3(1.2,0)
  silkscreen extent -1.68,-0.7 1.67,0.7, body extent -1.6,-0.65 1.6,0.65, height 0.8
DO-214AB-790X590X262 [mm] "Molded Diode, 2-Leads, Body 7,90x5,90mm, IPC Medium Density"
  rect 2.5x3.2 smd: 1(-2.8,0) 2(2.8,0)
  silkscreen extent -4.22,-3 3.5,3, body extent -3.95,-2.95 3.95,2.95, height 2.59
DS1021-2X3SF11-B [mm] "PLD 6 Pins 2,54mm Plug Header V/T Type"
  rect 1.9x1.9 hole 1: 1(-2.54,-1.27)
  round 1.9 hole 1: 2(0,-1.27) 4(-2.54,1.27)
  round 1.9 hole 1 mask+0.102: 3(2.54,-1.27) 5(0,1.27) 6(2.54,1.27)
  silkscreen extent -4.37,-3.07 3.81,2.54, body extent -3.81,-2.54 3.81,2.54, height 8.59
FCM-2-0603 [mm] "Chip Ferrite Bead, 2-Leads, Body 1,60x0,80mm, IPC Medium Density"
  rect 1.02x0.98 smd: 1(-0.74,0) 2(0.74,0)
  silkscreen extent -1.5,-0.75 1.5,0.75, body extent -0.8,-0.37 0.8,0.38, height 0.8
FSM4JSMA [mm]
  rrect50% 2.1x1.4 smd: 1(-4.55,2.24) 1(4.55,2.24) 2(-4.55,-2.24) 2(4.55,-2.24)
  silkscreen extent -3.2,-3.2 3.2,3.2, body extent -5,-3 5,3, height 5.13
HC-49/US [mm] "HC-49/US Quartz Crystall"
  round 1.03 hole 0.63: 1(-2.44,0) 2(2.44,0)
  silkscreen extent -5.5,-2.4 5.5,2.4, body extent -5.4,-2.3 5.4,2.3, height 3.53
HL0603 [mm] "Chip Resistor, 2-Leads, Body 1,60x0,80mm, IPC Medium Density"
  rrect25% 0.7x0.9 smd: 1(-0.8,0) 2(0.8,0)
  silkscreen extent -1.5,-0.75 1.5,0.75, body extent -0.81,-0.4 0.81,0.4, height 0.64
LQFP-100-P50-1400X1400X160-L60X22 [mm] "LQFP, 100-Leads, Body 14,00x14,00mm, Pitch 0,50mm, IPC Medium Density"
  rect 1.2x0.25 smd: 1(-7.75,6)
  rrect50% 1.2x0.25 smd: 2(-7.75,5.5) 3(-7.75,5) 4(-7.75,4.5) 5(-7.75,4) 6(-7.75,3.5) 7(-7.75,3) 8(-7.75,2.5) 9(-7.75,2) 10(-7.75,1.5) 11(-7.75,1) 12(-7.75,0.5) 13(-7.75,0) 14(-7.75,-0.5) 15(-7.75,-1) 16(-7.75,-1.5) 17(-7.75,-2) 18(-7.75,-2.5) 19(-7.75,-3) 20(-7.75,-3.5) 21(-7.75,-4) 22(-7.75,-4.5) 23(-7.75,-5) 24(-7.75,-5.5) 25(-7.75,-6) 51(7.75,-6) 52(7.75,-5.5) 53(7.75,-5) 54(7.75,-4.5) 55(7.75,-4) 56(7.75,-3.5) 57(7.75,-3) 58(7.75,-2.5) 59(7.75,-2) 60(7.75,-1.5) 61(7.75,-1) 62(7.75,-0.5) 63(7.75,0) 64(7.75,0.5) 65(7.75,1) 66(7.75,1.5) 67(7.75,2) 68(7.75,2.5) 69(7.75,3) 70(7.75,3.5) 71(7.75,4) 72(7.75,4.5) 73(7.75,5) 74(7.75,5.5) 75(7.75,6)
  rrect50% 0.25x1.2 smd: 26(-6,-7.75) 27(-5.5,-7.75) 28(-5,-7.75) 29(-4.5,-7.75) 30(-4,-7.75) 31(-3.5,-7.75) 32(-3,-7.75) 33(-2.5,-7.75) 34(-2,-7.75) 35(-1.5,-7.75) 36(-1,-7.75) 37(-0.5,-7.75) 38(0,-7.75) 39(0.5,-7.75) 40(1,-7.75) 41(1.5,-7.75) 42(2,-7.75) 43(2.5,-7.75) 44(3,-7.75) 45(3.5,-7.75) 46(4,-7.75) 47(4.5,-7.75) 48(5,-7.75) 49(5.5,-7.75) 50(6,-7.75) 76(6,7.75) 77(5.5,7.75) 78(5,7.75) 79(4.5,7.75) 80(4,7.75) 81(3.5,7.75) 82(3,7.75) 83(2.5,7.75) 84(2,7.75) 85(1.5,7.75) 86(1,7.75) 87(0.5,7.75) 88(0,7.75) 89(-0.5,7.75) 90(-1,7.75) 91(-1.5,7.75) 92(-2,7.75) 93(-2.5,7.75) 94(-3,7.75) 95(-3.5,7.75) 96(-4,7.75) 97(-4.5,7.75) 98(-5,7.75) 99(-5.5,7.75) 100(-6,7.75)
  silkscreen extent -9.6,-8.7 8.7,8.7, body extent -8,-8 8,8, height 1.6
QFN-24-P50-400X400X80-L40X25-T270X270 [mm] "QFN, 24-Leads, Body 4,00x4,00mm, Pitch 0,50mm, Thermal Pad 2,70x2,70mm, IPC Medium Density"
  rect 0.58x0.24 smd: 1(-1.9,1.25)
  rrect50% 0.58x0.24 smd: 2(-1.9,0.75) 3(-1.9,0.25) 4(-1.9,-0.25) 5(-1.9,-0.75) 6(-1.9,-1.25) 13(1.925,-1.25) 14(1.925,-0.75) 15(1.925,-0.25) 16(1.925,0.25) 17(1.925,0.75) 18(1.925,1.25)
  rrect50% 0.24x0.58 smd: 7(-1.25,-1.925) 8(-0.75,-1.925) 9(-0.25,-1.925) 10(0.25,-1.925) 11(0.75,-1.925) 12(1.25,-1.925) 19(1.25,1.925) 20(0.75,1.925) 21(0.25,1.925) 22(-0.25,1.925) 23(-0.75,1.925) 24(-1.25,1.925)
  rect 2.68x2.68 smd: 25(0,0)
  silkscreen extent -2.92,-2.15 2.15,2.15, body extent -2,-2 2.01,2.01, height 0.9
R0603 [mm] "Chip Resistor, 2-Leads, Body 1,60x0,80mm, IPC Medium Density"
  rect 0.8x0.9 smd: 1(-0.75,0) 2(0.75,0)
  silkscreen extent -1.45,-0.75 1.45,0.75, body extent -0.77,-0.43 0.78,0.43, height 0.43
SOD-123-368X160X135 [mm] "SOD, 2-Leads, Body 3,68x1,60mm, IPC Medium Density"
  rect 0.9x0.9 smd: 1(-1.65,0) 2(1.65,0)
  silkscreen extent -1.87,-0.9 1.4,0.9, body extent -1.82,-0.77 1.83,0.78, height 1.5
SOD-123FL-370X165X98 [mm] "SODFL, 2-Leads, Body 3,70x1,65mm, IPC Medium Density"
  rect 1.1x1 smd: 1(-1.5,0) 2(1.5,0)
  silkscreen extent -1.87,-0.9 1.4,0.9, body extent -1.8,-0.82 1.8,0.83, height 0.95
SOT230P700X180-4N [mm] "SOT223, 4-Leads, Body 6,50x7,00mm (avg), Pitch 2,30mm, IPC Medium Density"
  rect 2.15x1 smd: 1(-2.925,2.3) 2(-2.925,0) 3(-2.925,-2.3)
  rect 2.15x3.25 smd: 4(2.925,0)
  silkscreen extent -3.05,-3.35 1.55,3.47, body extent -1.85,-3.35 1.85,3.35, height 1.8
SOT-23-6-P95-290X280X145 [mm] "SOT-23, 6-Leads, Body 2,90x2,80mm, Pitch 0,95mm, IPC Medium Density"
  rect 1x0.6 smd: 1(-1.3,0.95)
  rrect50% 1x0.6 smd: 2(-1.3,0) 3(-1.3,-0.95) 4(1.3,-0.95) 5(1.3,0) 6(1.3,0.95)
  silkscreen extent -1.52,-1.55 0.5,1.9, body extent -1.4,-1.45 1.4,1.45, height 1.45
SRP-2-730X660X280 [mm] "Precision Wire Wound Inductor, 2-Leads, Body 7,30x6,60mm, IPC Medium Density"
  rect 3.2x3.15 smd: 1(-2.8,0) 2(2.8,0)
  silkscreen extent -3.8,-3.45 3.8,3.45, body extent -3.7,-3.3 3.7,3.3, height 3
WQFN-16-P50-300X300X100-L40X24-T168X168 [mm] "WQFN, 16-Leads, Body 3,00x3,00mm, Pitch 0,50mm, Thermal Pad 1,68x1,68mm, IPC Medium Density"
  rect 1.66x1.66 smd: 0(0,0)
  rect 0.6x0.24 smd: 1(-1.4,0.75)
  rrect50% 0.6x0.24 smd: 2(-1.4,0.25) 3(-1.4,-0.25) 4(-1.4,-0.75) 9(1.4,-0.75) 10(1.4,-0.25) 11(1.4,0.25) 12(1.4,0.75)
  rrect50% 0.24x0.6 smd: 5(-0.75,-1.4) 6(-0.25,-1.4) 7(0.25,-1.4) 8(0.75,-1.4) 13(0.75,1.4) 14(0.25,1.4) 15(-0.25,1.4) 16(-0.75,1.4)
  silkscreen extent -2.42,-1.7 1.7,1.7, body extent -1.5,-1.5 1.5,1.5, height 0.8

## Part data
BQ1: library part bq0008, "=????????", HelpURL=https://ecsxtal.com/hc-49usx, ID=bq0008, ??????=HC-49/US, ????????????=ECS-250-18-4X-?KM, ????????="????????? ????????? 25 ??? ??????????? ???????????? 18 ??", ?????????????="ECS, Inc. International", ???????=?????????, ??????a="25 ???", ???????="25 ???"
BQ2: library part bq0007, "=????????", HelpURL=https://ecsxtal.com/hc-49usx, ID=bq0007, ??????=HC-49/US, ????????????=ECS-500-20-4X-DU, ????????="????????? ????????? 50 ??? ??????????? ???????????? 20 ??", ?????????????="ECS, Inc. International", ???????=?????????, ??????a="50 ???", ???????="50 ???"
BQ3: library part bq0002, "=????????", HelpURL=https://www.murata.com/products/productdetail?partno=CSTCE12M0G52A-R0, ID=bq0002, ??????="3,20 x 1,30 x 0,70", ????????????=CSTCE12M0G52A-R0, ????????="???????????? ????????? 12 ??? ?? ??????????? ??????????????", ?????????????="Murata Manufacturing Co., Ltd.", ???????=???????, ??????a="12 ???", ???????="12 ???"
C1 C3 C4 C5 C6 C7 C8 C10 C17 C18 C19 C20 C21 C22 C24 C25 C35: library part c0081, "=????????", HelpURL=https://www.yageo.com/upload/media/product/productsearch/datasheet/mlcc/UPY-GPHC_X7R_6.3V-to-50V_20.pdf, ID=c0081, ??????=0603, ????????????=CC0603KRX7R6BB104, ??????????="10 ?", ???????="0,1 ??", ??????????? ??????????="10 ?", ????????="??????????? ???????????? ??? 0603 100 ?? 10 ? ±10 %", ??????????="±10 %", ?????????????="YAGEO Corp.", ??????? ???????????="?? –55 °? ?? +125 °?", ????????????? ??????????? ???????=X7R, ???????=???????
C2 C9 C11 C12 C13 C14 C15 C16 C23 C29 C32 C33 C36 C37 C44 C45 C46 C47 C48 C49: library part c0112, "=????????", HelpURL=https://www.yageo.com/upload/media/product/productsearch/datasheet/mlcc/UPY-GPHC_X5R_4V-to-50V_26.pdf, ID=c0112, ??????=0603, ????????????=CC0603KRX5R6BB105, ??????????="10 ?", ???????="1 ??", ??????????? ??????????="10 ?", ????????="??????????? ???????????? ??? 0603 1 ??? 10 ? ±10 %", ??????????="±10 %", ?????????????="YAGEO Corp.", ??????? ???????????="?? –55 °? ?? +85 °?", ????????????? ??????????? ???????=X5R, ???????=???????
C26 C28 C40 C41: library part c0020, "=????????", HelpURL=https://www.yageo.com/upload/media/product/productsearch/datasheet/mlcc/UPY-GP_NP0_16V-to-50V_18.pdf, ID=c0020, ??????=0402, ????????????=CC0402JRNPO9BN200, ??????????="50 ?", ???????=20, ??????????? ??????????="50 ?", ????????="??????????? ???????????? ??? 0402 20 ?? 50 ? ±5 %", ??????????="±5 %", ?????????????="YAGEO Corp.", ??????? ???????????="?? –55 °? ?? +125 °?", ????????????? ??????????? ???????=C0G, ???????=??????
C27 C42 C43: library part c0103, "=????????", HelpURL=https://www.yageo.com/upload/media/product/productsearch/datasheet/mlcc/UPY-GPHC_X7R_6.3V-to-50V_20.pdf, ID=c0103, ??????=0603, ????????????=CC0603KRX7R6BB474, ??????????="10 ?", ???????="0,47 ??", ??????????? ??????????="10 ?", ????????="??????????? ???????????? ??? 0603 470 ?? 10 ? ±10 %", ??????????="±10 %", ?????????????="YAGEO Corp.", ??????? ???????????="?? –55 °? ?? +125 °?", ????????????? ??????????? ???????=X7R, ???????=???????
C30: library part c0118, "=????????", HelpURL=https://www.yageo.com/upload/media/product/productsearch/datasheet/mlcc/UPY-GPHC_X5R_4V-to-50V_26.pdf, ID=c0118, ??????=0603, ????????????=CC0603KPX5R9BB105, ??????????="50 ?", ???????="1 ??", ??????????? ??????????="50 ?", ????????="??????????? ???????????? ??? 0603 1 ??? 50 ? ±10 %", ??????????="±10 %", ?????????????="YAGEO Corp.", ??????? ???????????="?? –55 °? ?? +85 °?", ????????????? ??????????? ???????=X5R, ???????=???????
C31: library part c0088, "=????????", HelpURL=https://www.yageo.com/upload/media/product/productsearch/datasheet/mlcc/UPY-GPHC_X7R_6.3V-to-50V_20.pdf, ID=c0088, ??????=0603, ????????????=CC0603KRX7R9BB104, ??????????="50 ?", ???????="0,1 ??", ??????????? ??????????="50 ?", ????????="??????????? ???????????? ??? 0603 100 ?? 50 ? ±10 %", ??????????="±10 %", ?????????????="YAGEO Corp.", ??????? ???????????="?? –55 °? ?? +125 °?", ????????????? ??????????? ???????=X7R, ???????=???????
C34: library part c0021, "=????????", HelpURL=https://www.yageo.com/upload/media/product/productsearch/datasheet/mlcc/UPY-GP_NP0_16V-to-50V_18.pdf, ID=c0021, ??????=0603, ????????????=CC0603FRNPO9BN200, ??????????="50 ?", ???????=20, ??????????? ??????????="50 ?", ????????="??????????? ???????????? ??? 0603 20 ?? 50 ? ±1 %", ??????????="±1 %", ?????????????="YAGEO Corp.", ??????? ???????????="?? –55 °? ?? +125 °?", ????????????? ??????????? ???????=C0G, ???????=???????
C38: library part c0143, "=????????", HelpURL=https://www.yageo.com/upload/media/product/productsearch/datasheet/mlcc/UPY-GPHC_X5R_4V-to-50V_26.pdf, ID=c0143, ??????=0603, ????????????=CC0603MRX5R5BB106, ??????????="6,3 ?", ???????="10 ??", ??????????? ??????????="6,3 ?", ????????="??????????? ???????????? ??? 0603 10 ??? 6,3 ? ±20 %", ??????????="±20 %", ?????????????="YAGEO Corp.", ??????? ???????????="?? –55 °? ?? +85 °?", ????????????? ??????????? ???????=X5R, ???????=??????
C39: library part c0163, "=????????", HelpURL=https://www.yageo.com/upload/media/product/productsearch/datasheet/mlcc/UPY-GPHC_X7R_6.3V-to-50V_20.pdf, ID=c0163, ??????=1206, ????????????=CC1206MKX7R7BB226, ??????????="16 ?", ???????="22 ??", ??????????? ??????????="16 ?", ????????="??????????? ???????????? ??? 1206 22 ??? 16 ? ±20 %", ??????????="±20 %", ?????????????="YAGEO Corp.", ??????? ???????????="?? –55 °? ?? +125 °?", ????????????? ??????????? ???????=X7R, ???????=????????
C50: library part c0134, "=????????", HelpURL=https://www.yageo.com/upload/media/product/productsearch/datasheet/mlcc/UPY-GPHC_X5R_4V-to-50V_26.pdf, ID=c0134, ??????=0603, ????????????=CC0603KRX5R6BB475, ??????????="10 ?", ???????="4,7 ??", ??????????? ??????????="10 ?", ????????="??????????? ???????????? ??? 0603 4,7 ??? 10 ? ±10 %", ??????????="±10 %", ?????????????="YAGEO Corp.", ??????? ???????????="?? –55 °? ?? +85 °?", ????????????? ??????????? ???????=X5R, ???????=??????
C51 C52 C53 C54 C55 C56 C57 C58: library part c0080, "=????????", HelpURL=https://www.yageo.com/upload/media/product/productsearch/datasheet/mlcc/UPY-GPHC_X5R_4V-to-50V_26.pdf, ID=c0080, ??????=0402, ????????????=CC0402KRX5R6BB104, ??????????="10 ?", ???????="0,1 ??", ??????????? ??????????="10 ?", ????????="??????????? ???????????? ??? 0402 100 ?? 10 ? ±10 %", ??????????="±10 %", ?????????????="YAGEO Corp.", ??????? ???????????="?? –55 °? ?? +85 °?", ????????????? ??????????? ???????=X5R, ???????=???????
C59 C64: library part c0115, "=????????", HelpURL=https://www.yageo.com/upload/media/product/productsearch/datasheet/mlcc/UPY-GPHC_X7R_6.3V-to-50V_20.pdf, ID=c0115, ??????=0603, ????????????=CC0603KRX7R7BB105, ??????????="16 ?", ???????="1 ??", ??????????? ??????????="16 ?", ????????="??????????? ???????????? ??? 0603 1 ??? 16 ? ±10 %", ??????????="±10 %", ?????????????="YAGEO Corp.", ??????? ???????????="?? –55 °? ?? +125 °?", ????????????? ??????????? ???????=X7R, ???????=???????
C60 C63: library part c0097, "=????????", HelpURL=https://www.yageo.com/upload/media/product/productsearch/datasheet/mlcc/UPY-GPHC_X7R_6.3V-to-50V_20.pdf, ID=c0097, ??????=0603, ????????????=CC0603KRX7R6BB225, ??????????="10 ?", ???????="2,2 ??", ??????????? ??????????="10 ?", ????????="??????????? ???????????? ??? 0603 2,2 ??? 10 ? ±10 %", ??????????="±10 %", ?????????????="YAGEO Corp.", ??????? ???????????="?? –55 °? ?? +125 °?", ????????????? ??????????? ???????=X7R, ???????=??????
C61 C65: library part c0033, "=????????", HelpURL=https://www.yageo.com/upload/media/product/productsearch/datasheet/mlcc/UPY-GPHC_X7R_6.3V-to-50V_20.pdf, ID=c0033, ??????=0603, ????????????=CC0603KRX7R6BB103, ??????????="10 ?", ???????="0,01 ??", ??????????? ??????????="10 ?", ????????="??????????? ???????????? ??? 0603 10 ?? 10 ? ±10 %", ??????????="±10 %", ?????????????="YAGEO Corp.", ??????? ???????????="?? –55 °? ?? +125 °?", ????????????? ??????????? ???????=X7R, ???????=???????
C62: library part c0057, "=????????", HelpURL=https://www.yageo.com/upload/media/product/productsearch/datasheet/mlcc/UPY-GPHC_X7R_6.3V-to-50V_20.pdf, ID=c0057, ??????=0603, ????????????=CC0603KRX7R6BB104, ??????????="10 ?", ???????="0,1 ??", ??????????? ??????????="10 ?", ????????="??????????? ???????????? ??? 0603 100 ?? 10 ? ±10 %", ??????????="±10 %", ?????????????="YAGEO Corp.", ??????? ???????????="?? –55 °? ?? +125 °?", ????????????? ??????????? ???????=X7R, ???????=???????
DD1: library part dd0029, "=????????", Built_By=EMA_Matt, Copyright="Copyright (C) 2018 Accelerated Designs. All rights reserved", Datasheet=https://www.nxp.com/docs/en/data-sheet/SJA1105.pdf, HelpURL=https://www.nxp.com/docs/en/data-sheet/SJA1105.pdf, ID=dd0029, Manufacturer_Part_Number=SJA1105TELY, RefDes=RefDes, SourceLibrary=Add_to_database_2020-10-19, Type=DEV, Vendor=NXP, ??????=LFBGA-159, ????????????=SJA1105, ????????="Ethernet-switch ?? 5 ??????", ?????????????=NXP, ???????=?????????
DD2 DD5 DD6: library part dd0028, "=????????", HelpURL=http://ww1.microchip.com/downloads/en/DeviceDoc/8742a.pdf, ID=dd0028, ??????=QFN-24, ????????????=LAN8742A, ????????="Ethernet-transiver PHY", ?????????????=Microchip, ???????=?????????
DD3: library part dd0017, "=????????", HelpURL=https://www.ti.com/product/TLV62130, ID=dd0017, ??????? ??????????="?? 3,0 ? ?? 17 ?", ???????? ??????????="?? 0,9 ?? 5,25 ?", ????????????? ???="?? 3,0 ?", ??????=WQFN-16, ????????????=TLV62130ARGTT, ????????="?????????? ??????????????? ?????????? 3,0…17 ? / 0,9…5,25 ? ? 3,0 ?", ?????????????="Texas Instruments Inc.", ??????? ???????????="?? –40 °? ?? +85 °?", ???????=???????, ??????? ????????????="?? 1,25 ??? ?? 2,5 ???"
DD4: library part dd0025, "=????????", HelpURL=http://www.farnell.com/datasheets/1776449.pdf, ID=dd0025, ??????? ??????????="?? 15 ?", ???????? ??????????="1.2 ?", ????????????? ???="?? 0.8 ?", ??????=SOT-223, ????????????=LD1117S12TR, ????????="???????? ?????????? ??????????????? ?????????? 1.3-15 ? / 1.2 ? ? 0.8 ?", ?????????????=STMicroelectronics, ??????? ???????????="?? –40 °? ?? +125 °?", ???????=?????????, ??????? ????????????=-
DD7: library part dd0001, "=????????", HelpURL=https://www.st.com/en/microcontrollers-microprocessors/stm32f407vg.html, ID=dd0001, ??????=LQFP-100, ???????????? ???????? ???????="168 ???", ????????????=STM32F407VGT6, ????????="ARM Cortex-M4 32-????????? ??????????????? 168 ??? 1 ????? FLASH-??????", ?????????????? ??????????="CAN, I2C, SDIO, I2S/SPI, UART/USART, USB", ?????????????=STMicroelectronics, ??????? ??????????="?? 1,8 ? ?? 3,6 ?", ??????? ???????????="?? –40 °? ?? +85 °?", ???????=???????
HL1: library part hl0001, "=????????", HelpURL=https://www.vishay.com/leds/list/product-83172/, ID=hl0001, ??????=0603, ????????????=TLMS1000-GS08, ??????????? ????? ?????="628 ??", ??????????? ???? ?????="4 ???", ??????????? ??????? ??????????="1,8 ?", ??????????? ?????? ???="15 ??", ????????="????????? ??? 0603 ???????", ?????????????="Vishay Intertechnology, Inc.", ??????? ???????????="?? –40 °? ?? +100 °?", ???????????? ????????="40 ???", ???????=????????, ????=???????
L1 L2 L3 L4 L5 L6: library part l0005, "=????????", HelpURL=https://www.tai-tech.com.tw/en/product?mcls=&cls=1489980553&cls2=1490267380&cls3=&pid=1491959545, ID=l0005, ??????=0603, ????????????=FCM1608KF-331T03, ????????="?????????? ?????? 330 ?? ±25 %", ??????????, 100 ???="±25 %", ?????????????="TAI-TECH Advanced Electronics Co., Ltd.", ??????? ???????????="?? –55 °? ?? +125 °?", ?????????????, 100 ???="330 ??", ????????????? ??? ?????????? ????="0,5 ??", ???????=?????????
L7: library part l0013, "=????????", HelpURL=https://www.bourns.com/products/magnetic-products/power-inductors-aec-q200-compliant/product/SRP7028A, ID=l0013, ?????????????="22 ????", ??????="7,3 x 6,6 x 2,8", ???????????? ???????? ?????????????="190 ???", ????????????=SRP7028A-220M, ???????="22 ????", ??????????? ???????? ?????????????="165 ???", ??????????? ??? (??? ??????? ?? 20 °?/40 °?)="2 ?", ????????="??????? ????????????? 22 ???? ±20 %", ??????????="±20 %", ?????????????="Bourns, Inc.", ??????? ??????????="?? ???????", ??????? ???????????="?? –55 °? ?? +150 °?", ??????????? ???????="10 ???", ??? ?????????="3,5 ?", ???????=????????
L8: library part l0001, "=????????", HelpURL=https://www.murata.com/en-global/products/productdetail?partno=BLM18KG221SH1%23, ID=l0001, ??????=0603, ????????????=BLM18KG221SH1D, ????????="?????????? ?????? 220 ?? ±25 %", ??????????, 100 ???="±25 %", ?????????????="Murata Manufacturing Co., Ltd.", ??????? ???????????="?? –55 °? ?? +125 °?", ?????????????, 100 ???="220 ??", ????????????? ??? ?????????? ????="0,05 ??", ???????=????????
R1: library part r0028, "=????????", HelpURL=https://www.yageo.com/upload/media/product/productsearch/datasheet/rchip/PYu-RC_Group_51_RoHS_L_11.pdf, ID=r0028, ??????=0603, ????????????=RC0603FR-07750RL, ???????=750, ??????????? ??????????="75 ?", ??????????? ???="1 ?", ????????="???????? ??? 0603 750 ?? ±1 % 0,1 ??", ??????????="±1 %", ??????????="??? E24", ?????????????="YAGEO Corp.", ??????? ???????????="?? –55 °? ?? +155 °?", ???????=???????
R2 R5 R7 R8 R14 R17 R20 R21 R24 R25 R26 R27: library part r0204, "=????????", HelpURL=https://www.yageo.com/upload/media/product/productsearch/datasheet/rchip/PYu-RC_Group_51_RoHS_L_11.pdf, ID=r0204, ??????=0603, ????????????=RC0603FR-0749RL, ???????=49.9, ??????????? ??????????="75 ?", ??????????? ???="1 ?", ????????="???????? ??? 0603 49 ?? ±1 % 0,1 ??", ??????????="±1 %", ??????????="??? E24", ?????????????="YAGEO Corp.", ??????? ???????????="?? –55 °? ?? +155 °?", ???????=?????????
R3 R15 R18: library part r0108, "=????????", HelpURL=https://www.yageo.com/upload/media/product/productsearch/datasheet/rchip/PYu-RC_Group_51_RoHS_L_11.pdf, ID=r0108, ??????=0603, ????????????=RC0603FR-0712KL, ???????="12 ?", ??????????? ??????????="75 ?", ??????????? ???="1 ?", ????????="???????? ??? 0603 12 ??? ±1 % 0,1 ??", ??????????="±1 %", ??????????="??? E24", ?????????????="YAGEO Corp.", ??????? ???????????="?? –55 °? ?? +155 °?", ???????=???????
R4 R16 R19: library part r0052, "=????????", HelpURL=https://www.yageo.com/upload/media/product/productsearch/datasheet/rchip/PYu-RC_Group_51_RoHS_L_11.pdf, ID=r0052, ??????=0603, ????????????=RC0603FR?-07100RL, ???????=100, ??????????? ??????????="75 ?", ??????????? ???="1 ?", ????????="???????? ??? 0603 100 ?? ±1 % 0,1 ??", ??????????="±1 %", ??????????="??? E24", ?????????????="YAGEO Corp.", ??????? ???????????="?? –55 °? ?? +155 °?", ???????=???????
R6 R9 R22 R23 R28 R29: library part r0060, "=????????", HelpURL=https://www.yageo.com/upload/media/product/productsearch/datasheet/rchip/PYu-RC_Group_51_RoHS_L_11.pdf, ID=r0060, ??????=0603, ????????????=RC0603FR-07220RL, ???????=220, ??????????? ??????????="75 ?", ??????????? ???="1 ?", ????????="???????? ??? 0603 220 ?? ±1 % 0,1 ??", ??????????="±1 %", ??????????="??? E24", ?????????????="YAGEO Corp.", ??????? ???????????="?? –55 °? ?? +155 °?", ???????=????????
R10: library part r0054, "=????????", HelpURL=https://www.yageo.com/upload/media/product/productsearch/datasheet/rchip/PYu-RC_Group_51_RoHS_L_11.pdf, ID=r0054, ??????=0603, ????????????=RC0603FR?-07120RL, ???????=120, ??????????? ??????????="75 ?", ??????????? ???="1 ?", ????????="???????? ??? 0603 120 ?? ±1 % 0,1 ??", ??????????="±1 %", ??????????="??? E24", ?????????????="YAGEO Corp.", ??????? ???????????="?? –55 °? ?? +155 °?", ???????=???????
R11: library part r0141, "=????????", HelpURL=https://www.yageo.com/upload/media/product/productsearch/datasheet/rchip/PYu-RC_Group_51_RoHS_L_11.pdf, ID=r0141, ??????=0603, ????????????=RC0603FR-07100KL, ???????="100 ?", ??????????? ??????????="75 ?", ??????????? ???="1 ?", ????????="???????? ??? 0603 100 ??? ±1 % 0,1 ??", ??????????="±1 %", ??????????="??? E24", ?????????????="YAGEO Corp.", ??????? ???????????="?? –55 °? ?? +155 °?", ???????=?????????
R12: library part r0172, "=????????", HelpURL=https://www.yageo.com/upload/media/product/productsearch/datasheet/rchip/PYu-RC_Group_51_RoHS_L_11.pdf, ID=r0172, ??????=0603, ????????????=RC0603FR-07910KL, ???????="910 ?", ??????????? ??????????="75 ?", ??????????? ???="1 ?", ????????="???????? ??? 0603 910 ??? ±1 % 0,1 ??", ??????????="±1 %", ??????????="??? E24", ?????????????="YAGEO Corp.", ??????? ???????????="?? –55 °? ?? +155 °?", ???????=???????
R13: library part r0152, "=????????", HelpURL=https://www.yageo.com/upload/media/product/productsearch/datasheet/rchip/PYu-RC_Group_51_RoHS_L_11.pdf, ID=r0152, ??????=0603, ????????????=RC0603FR-07180KL, ???????="180 ?", ??????????? ??????????="75 ?", ??????????? ???="1 ?", ????????="???????? ??? 0603 180 ??? ±1 % 0,1 ??", ??????????="±1 %", ??????????="??? E24", ?????????????="YAGEO Corp.", ??????? ???????????="?? –55 °? ?? +155 °?", ???????=???????
R30 R35: library part r0105, "=????????", HelpURL=https://www.yageo.com/upload/media/product/productsearch/datasheet/rchip/PYu-RC_Group_51_RoHS_L_11.pdf, ID=r0105, ??????=0603, ????????????=RC0603FR-0710KL, ???????="10 ?", ??????????? ??????????="75 ?", ??????????? ???="1 ?", ????????="???????? ??? 0603 10 ??? ±1 % 0,1 ??", ??????????="±1 %", ??????????="??? E24", ?????????????="YAGEO Corp.", ??????? ???????????="?? –55 °? ?? +155 °?", ???????=???????
R31 R32 R33 R34: library part r0034, "=????????", HelpURL=https://www.yageo.com/upload/media/product/productsearch/datasheet/rchip/PYu-RC_Group_51_RoHS_L_11.pdf, ID=r0034, ??????=0603, ????????????=RC0603FR-0722RL, ???????=22, ??????????? ??????????="75 ?", ??????????? ???="1 ?", ????????="???????? ??? 0603 22 ?? ±1 % 0,1 ??", ??????????="±1 %", ??????????="??? E24", ?????????????="YAGEO Corp.", ??????? ???????????="?? –55 °? ?? +155 °?", ???????=????????
S1: library part s0001, "=????????", HelpURL=https://www.te.com/usa-en/product-4-1437565-1.html, ID=s0001, ?????????? ?????????=4, ??????="6,00 x 6,00 x 4,98", ????????????=FSM4JSMA, ????????="???????? ?????? ?????????????? ???????", ?????????????="TE Connectivity", ????????=?????????, ??????? ???????????="?? –35 °? ?? +85 °?", ????????????? ????????="100 ???", ??? ????????="50 ?? @ 24 ?", ???????=???????
VD1: library part vd0001, "=????????", HelpURL=https://www.onsemi.com/products/discretes-drivers/diodes-rectifiers/schottky-diodes-schottky-rectifiers/mbr0530t1g, ID=vd0001, ??????=SOD-123, ???????????? ???????? ??????????="30 ?", ???????????? ?????? ??????????="0,43 ?", ???????????? ?????? ???="0,5 ?", ????????????=MBR0530T1G, ????????="???? ?????? 30 ? 0,5 ?", ?????????????="ON Semiconductor", ??????? ???????????="?? –65 °? ?? +125 °?", ???????=???????
VD2: library part vd0009, "=????????", HelpURL=https://www.littelfuse.com/products/tvs-diodes/surface-mount/1_5smc.aspx, ID=vd0009, ??????=DO-214AB, ????????????=1.5SMC62CA, ????????="??????????????? ??????? ?????? ??? ?????????? ????? 53 ?", ?????????????="Littelfuse, Inc.", ???????=????????